# Altium PCB AFT05MS004.PcbDoc
Units mm, origin at the board's own origin, x right, y up, seen from the top; angles counter-clockwise.
Board outline 61.09 x 57.95 mm, 2 copper layers (Top Layer, Bottom Layer), stack 1.27 mm thick; 23 components, 12 nets, 62 pads, 66 vias.
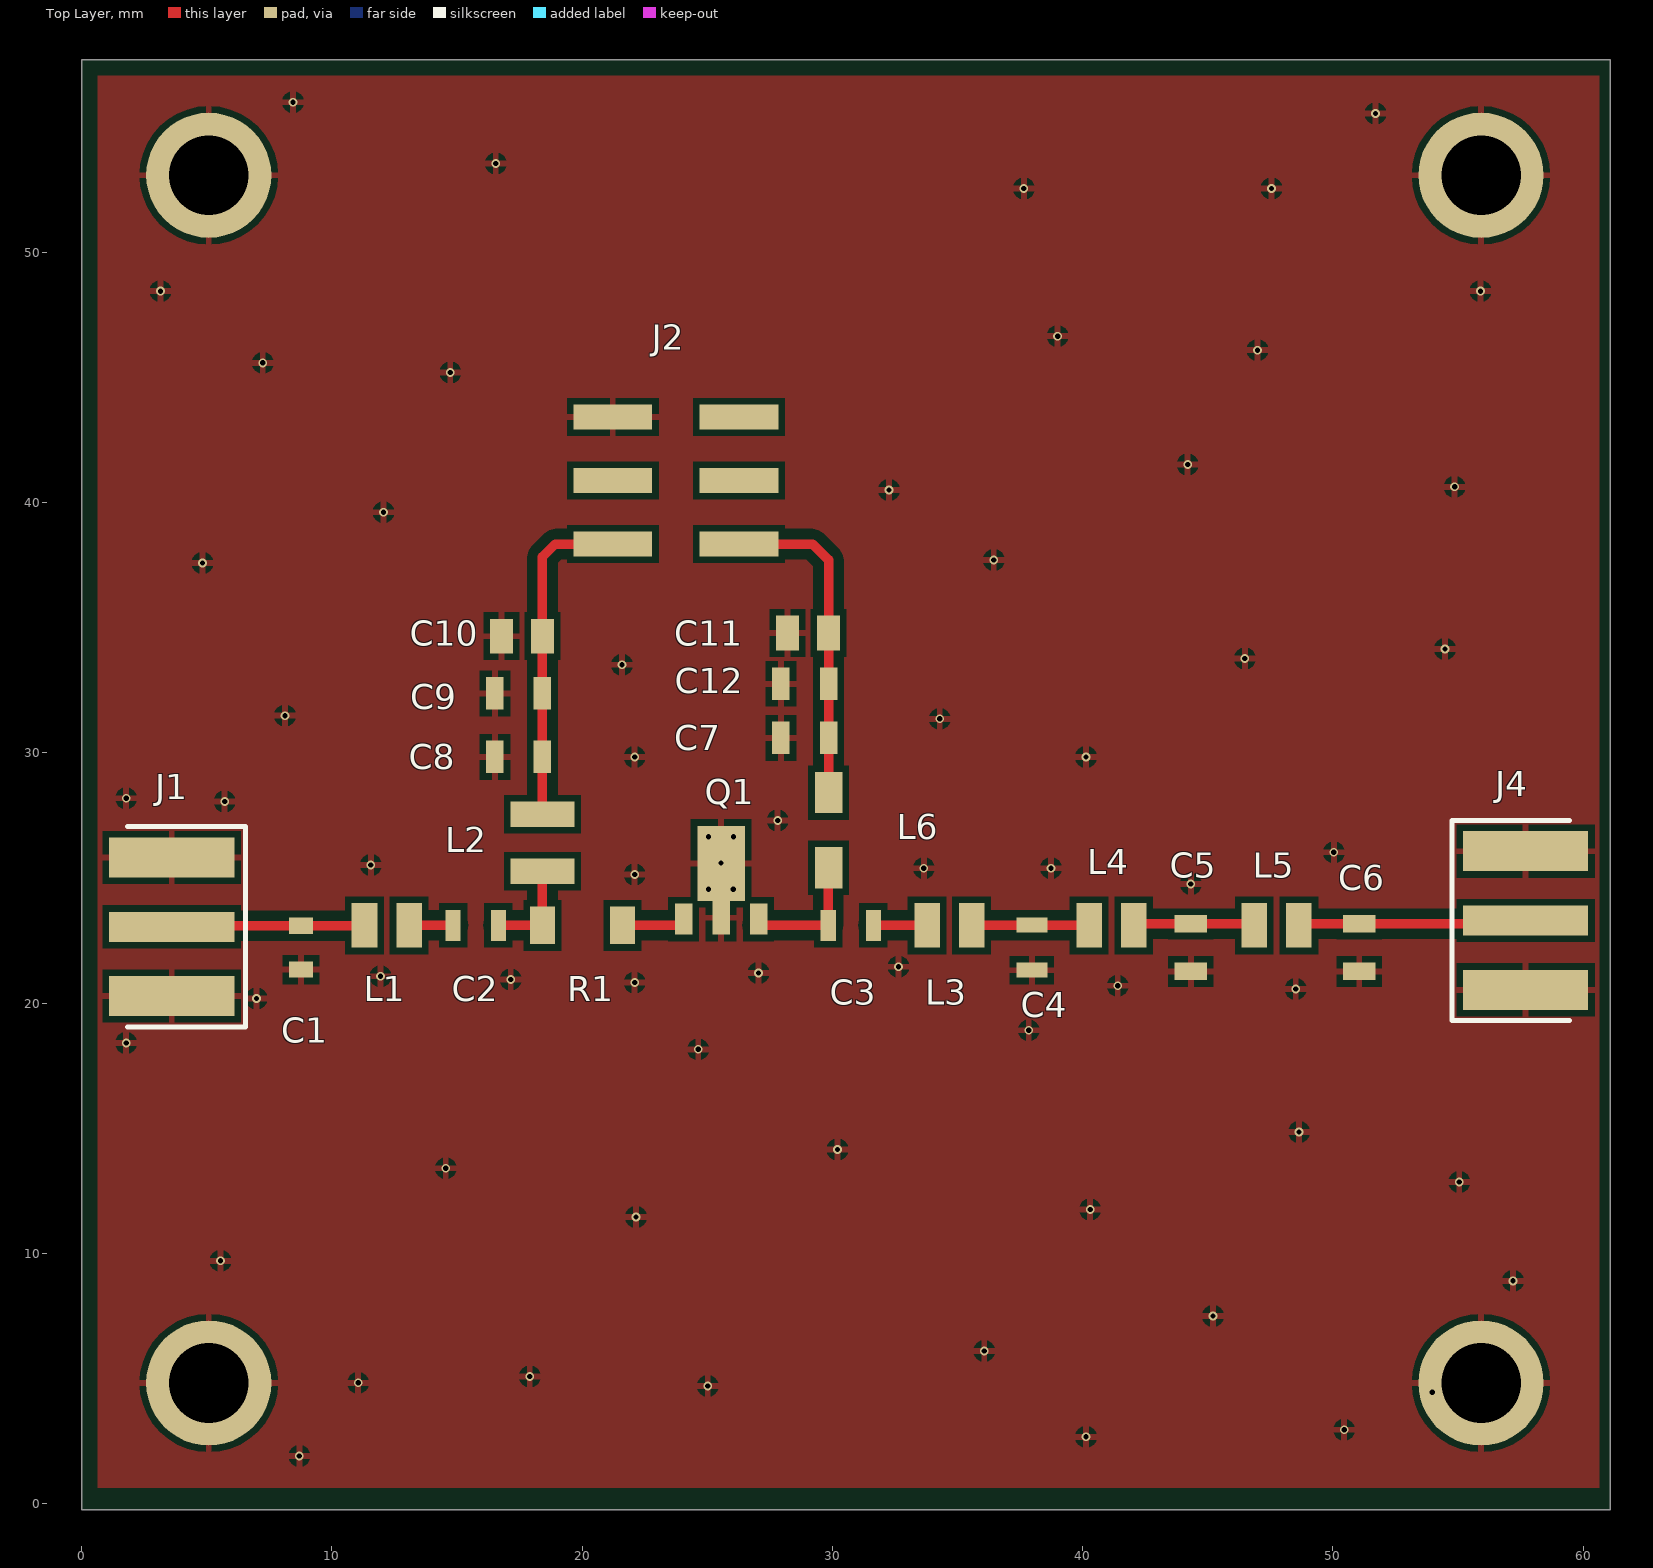
[diagram p0: Top Layer view]
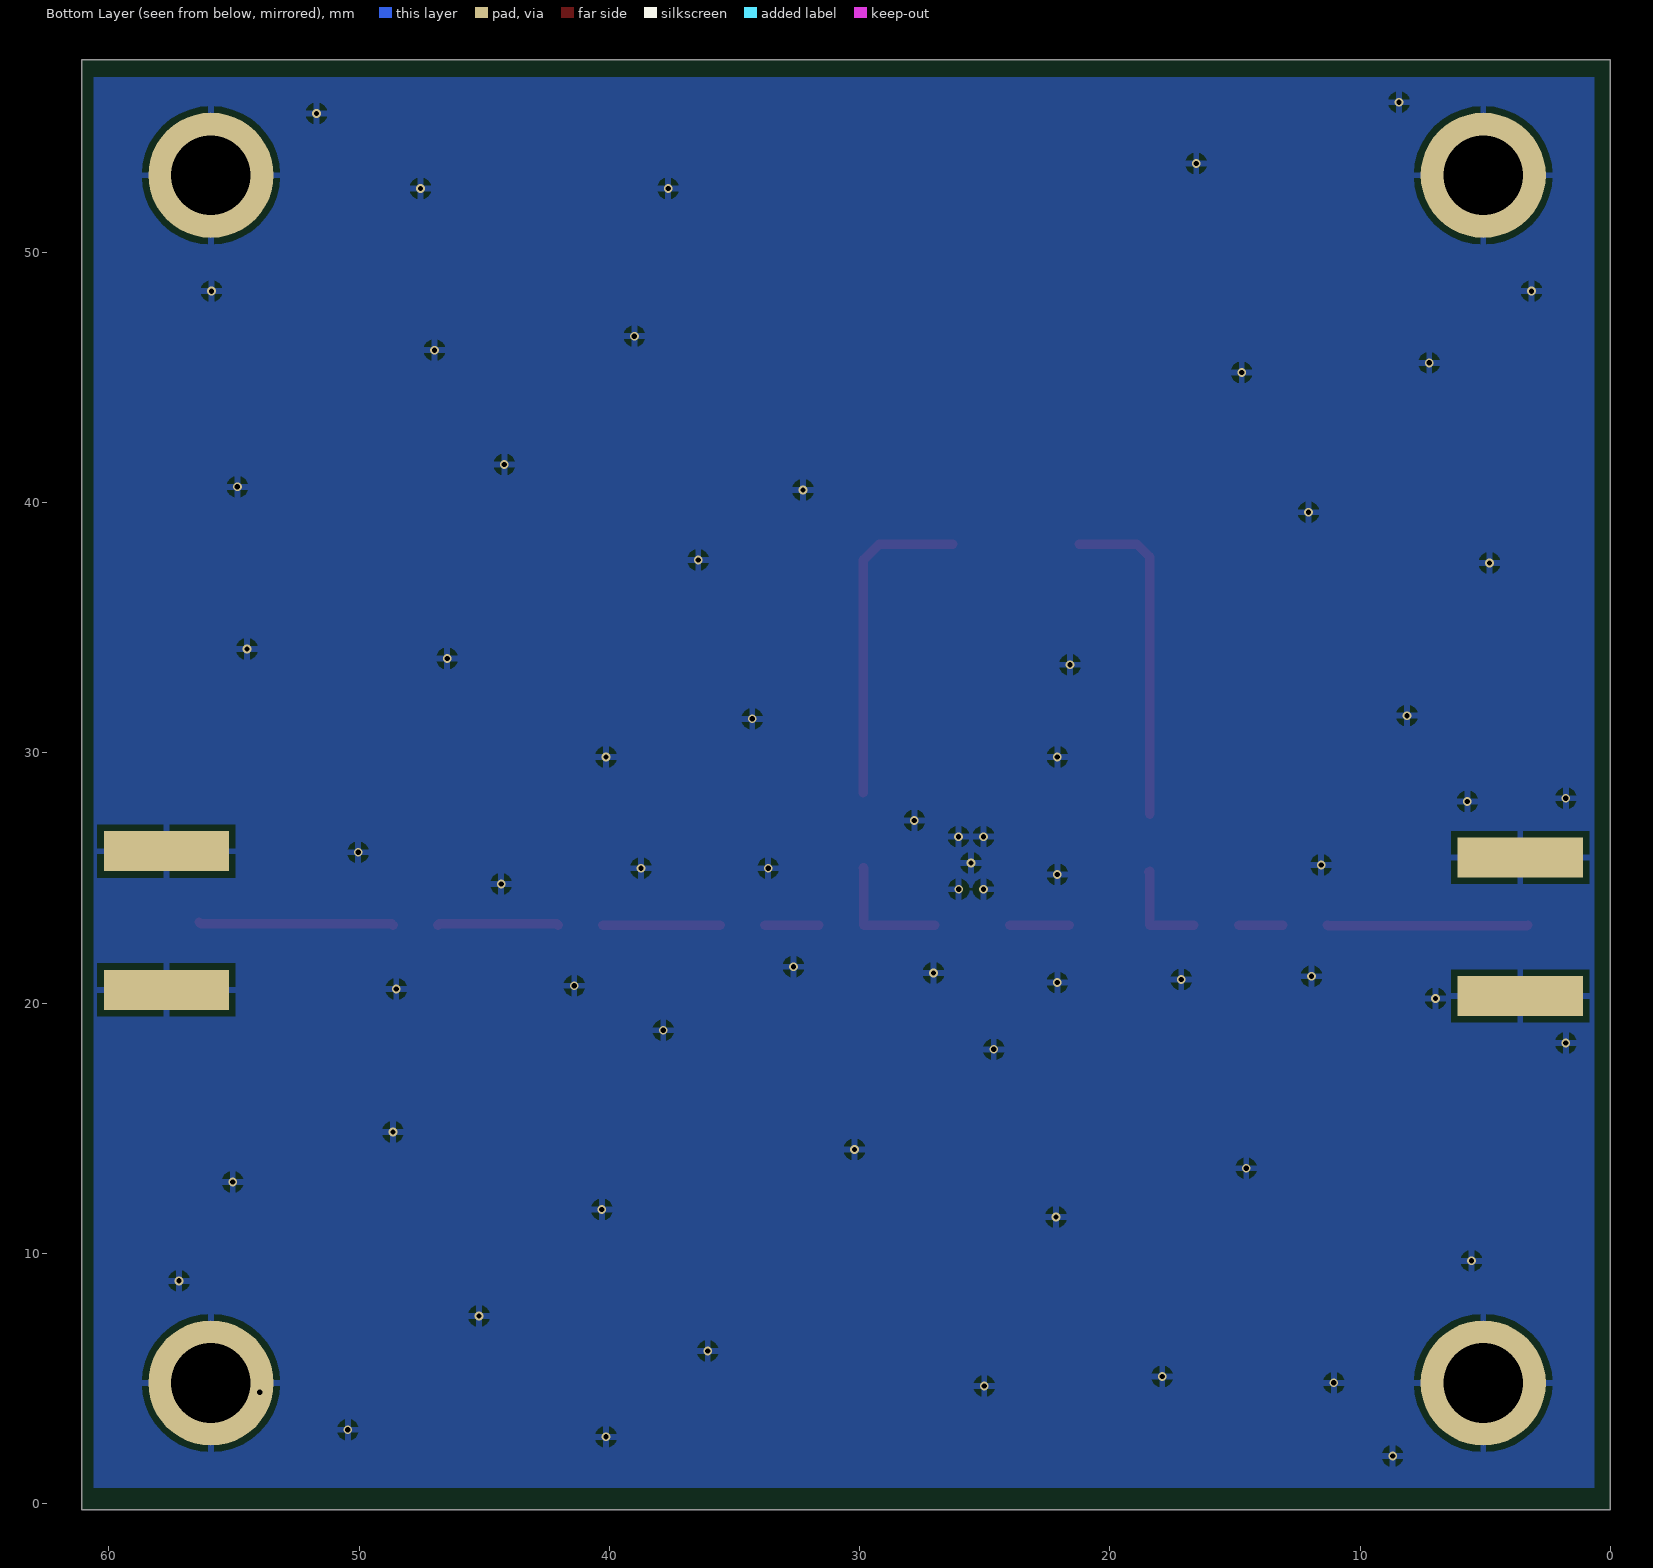
[diagram p1: Bottom Layer view, seen from below]

## Layer stack, top to bottom
Top Solder: solder mask 0.0152, Solder Resist, Dk 3.5
Top Layer: signal copper 0.035
Dielectric 1: dielectric 1.2, FR-4, Dk 4.8
Bottom Layer: signal copper 0.035
Bottom Solder: solder mask 0.0152, Solder Resist, Dk 3.5

## Board outline
0,-0.254 61.087,-0.254 61.087,57.7 0,57.7

## Design rules (kind name [scope] priority, off if disabled: settings)
Clearance [All] p1: gap=0.254 ignorepadtopadclearanceinfootprint=FALSE except(0: Arc-Hole Track-Hole SMDPad-Hole THPad-Hole Via-Hole Fill-Hole Poly-Hole Region-Hole Text-Hole; 0.15: Arc-Arc Arc-Track Arc-SMDPad Track-Track Track-SMDPad SMDPad-SMDPad; 0.4: Arc-Fill Arc-Poly Arc-Region Track-Fill Track-Poly Track-Region; 0.5: THPad-THPad)
MinimumSolderMaskSliver [All] p1: minsoldermaskwidth=0.1
PolygonConnect [All] p1: connectstyle=Relief reliefconductorwidth=0.254 reliefentries=4 polygonreliefangle="90 Angle" airgapwidth=0.254
RoutingLayers [All] p1: top layer_v5=TRUE bottom layer_v5=FALSE
RoutingVias [All] p1: holewidth=0.15 width=0.25 viastyle="Through Hole" minholewidth=0.15 minwidth=0.25 maxholewidth=0.2 maxwidth=0.3
SolderMaskExpansion [All] p1: expansion=0.102 istentingtop=FALSE
Width [All] p1: maxlimit=0.9 minlimit=0.15 preferedwidth=0.254 minimp=50.000000 maximp=50.000000 favimp=50.000000
28 further rules are at their usual default settings.

## Components (designator, comment, footprint, x,y, rotation, side; value= is the part's Value field where it differs from the comment)
C1 "GQM2195C2E430GB12D" GQM2195C2E100GB12D 8.763,22.215 r90 top
C2 "GRM21A5C2E102FWA1J" GRM21x 15.748,23.104 r0 top
C3 "GRM21A5C2E102FWA1J" GRM21x 30.734,23.104 r0 top
C4 "GRM21A5C2J820JWA1D" GRM21x 37.973,22.215 r90 top
C5 "GRM21A5C2E390FW01D" FP-GRM21A-0_2-MFG 44.323,22.215 r270 top
C6 "GQM2195C2E300GB12D" FP-GRM21A-0_2-MFG 51.054,22.215 r270 top
C7 "GQM2195C2E300GB12D" FP-GRM21A-0_2-MFG 28.895,30.597 r0 top
C8 "GQM2195C2E300GB12D" FP-GRM21A-0_2-MFG 17.465,29.835 r0 top
C9 "GRM21A5C2E102FWA1J" FP-GRM21A-0_2-MFG 17.465,32.375 r0 top
C10 "GJ821BR71H105KA12K" CAPC2012X135N 17.595,34.661 r0 top
C11 "GJ821BR71H105KA12K" CAPC2012X135N 29.025,34.788 r0 top
C12 "GRM21A5C2E102FWA1J" FP-GRM21A-0_2-MFG 28.895,32.756 r0 top
J1 "CON-SMA-EDGE-S" FP-CON-SMA-EDGE-S-MFG -3.66,23.05 r90 top
J2 "M20-8760342R" M208760342R 23.749,40.884 r90 top
J4 "CON-SMA-EDGE-S" FP-CON-SMA-EDGE-S-MFG 64.96,23.3 r270 top
L1 "LQW2BAS27NJ00L" LQW2BAN11NG00L 12.193,23.104 r0 top
L2 "LQW2UAS1R0F00L" LQW2UAS12NG00L 18.415,26.406 r90 top
L3 "LQW2BAS15NJ00L" LQW2BAN11NG00L 34.671,23.104 r0 top
L4 "LQW2BAS56NG00L" FP-LQW2BAN_00-MFG 41.148,23.104 r180 top
L5 "LQW2BAS56NG00L" FP-LQW2BAN_00-MFG 47.752,23.104 r180 top
L6 "744764901" INDM3425X240N 29.845,26.914 r90 top
Q1 "AFT05MS004NT1" MMG38151BT1 25.551,23.858 r0 top
R1 "RT1206FRE077R5L" FP-RT1206-MFG 20.015,23.104 r0 top value=7.5Ω

## Footprints (in the part's own frame and the unit in brackets; to place one, negate y for a bottom-side part, rotate by r counter-clockwise, add the part's x,y. Pads: shape width x height; smd on the part's side, far side on the other; paste and mask are expansions set on the pad)
CAPC2012X135N [mm]
  rect 0.91x1.39 smd: 1(-0.82,0) 2(0.82,0)
FP-CON-SMA-EDGE-S-MFG [mm]
  rect 1.2x5 smd paste+0 mask+0: 1(0,-7.26)
  rect 1.6x5 smd paste+0 mask+0: 2(-2.77,-7.26) 3(2.77,-7.26)
  rect 1.6x5 smd far side paste+0 mask+0: 4(-2.77,-7.26) 5(2.77,-7.26)
  silkscreen extent -4,-10.2 4,-5.5
FP-GRM21A-0_2-MFG [mm]
  rect 0.7x1.3 smd paste+0 mask+0: 1(-0.95,0) 2(0.95,0)
  body extent -1.4,-0.82 1.4,0.82, height 0.25
FP-LQW2BAN_00-MFG [mm]
  rect 1.02x1.78 smd paste+0 mask+0: 1(-0.89,0) 2(0.89,0)
  body extent -1.5,-0.99 1.5,0.99, height 0.25
FP-RT1206-MFG [mm]
  rect 1x1.5 smd paste+0 mask+0: 1(-1.6,0) 2(1.6,0)
  body extent -2.2,-0.95 2.2,0.95, height 0.25
GQM2195C2E100GB12D [mm]
  rect 0.65x0.95 smd: 1(-0.875,0) 2(0.875,0)
GRM21x [mm]
  rect 0.6x1.25 smd: 1(-0.9,0) 2(0.9,0)
INDM3425X240N [mm]
  rect 1.65x1.1 smd: 1(-1.5,0) 2(1.5,0)
LQW2BAN11NG00L [mm]
  rect 1.02x1.78 smd: 1(-0.89,0) 2(0.89,0)
LQW2UAS12NG00L [mm]
  rect 1.015x2.54 smd: 1(-1.143,0) 2(1.143,0)
M208760342R [mm]
  rect 1x3.15 smd: 1(-2.54,2.525) 2(-2.54,-2.525) 3(0,2.525) 4(0,-2.525) 5(2.54,2.525) 6(2.54,-2.525)
MMG38151BT1 [mm]
  rect 0.7x1.25 smd: 1(-1.5,-0.5) 3(1.5,-0.5)
  rect 0.7x1.35 smd: 2(0,-0.45)
  rect 1.9x3 smd: 4(0,1.725)

## Part data
C1 C4: "Capacitor", Manufacturer_Name="Murata Electronics"
  C1: Datasheet Link=https://psearch.en.murata.com/capacitor/product/GQM2195C2E430GB12%23.html, Height=1mm, Manufacturer_Part_Number=GQM2195C2E430GB12D
  C4: Datasheet Link=https://search.murata.co.jp/Ceramy/image/img/A01X/G101/ENG/GRM21A5C2J820JWA1-01.pdf, Height=1.25mm, Manufacturer_Part_Number=GRM21A5C2J820JWA1D
C2 C3: "Capacitor", Manufacturer_Name="Murata Electronics", Mouser Part Number=81-GRM21A5C2E102FWA1, Datasheet Link=https://search.murata.co.jp/Ceramy/image/img/A01X/G101/ENG/GRM21A5C2E102FWA1-01.pdf, Height=1.25mm, Manufacturer_Part_Number=GRM21A5C2E102FWA1J, Mouser Price/Stock=https://www.mouser.co.uk/ProductDetail/Murata-Electronics/GRM21A5C2E102FWA1J?qs=81r%252BiQLm7BQ9LqoY9FDtCA%3D%3D
C5 C6 C7 C8 C9 C12: library part CMP-06035-012030-1, "Chip Multilayer Ceramic Capacitors for General Purpose, 0805, 1000pF, C0G, 30ppm/°C, 1%, 250V"
C10 C11: "Capacitor", Manufacturer_Name="Murata Electronics", Mouser Part Number=81-GJ821BR71H105KA2K, Datasheet Link=https://www.mouser.it/datasheet/2/281/GJ821BR71H105KA12-01-1633769.pdf, Height=1.35mm, Manufacturer_Part_Number=GJ821BR71H105KA12K, Mouser Price/Stock=https://www.mouser.co.uk/ProductDetail/Murata-Electronics/GJ821BR71H105KA12K?qs=QzBtWTOodeUPH%252BEtzhwB2g%3D%3D
J1 J4: library part CMP-204357-000001-1, "CONN SMA JACK STR EDGE MNT", Frequency=18GHz, Manufacturer="RF Solutions Ltd.", Package=CONN_JACK, Automotive=No, Category=Conn, ComponentLink2Description=Datasheet, ComponentLink2URL=https://www.rfsolutions.co.uk/downloads/1498648656DS-CON-EDGE-SMA-4.pdf, Conn Orientation="Right Angle", Contact Material=Gold, Device Class L1=Connectors, Device Class L2="RF / Coaxial Connectors", Device Class L3=unset, Digikey Description="CONN SMA JACK STR EDGE MNT", Footprint Url=https://forum.upverter.com/uploads/default/original/3X/b/e/be75b907af57498775929d6d9099689c472e0307.pdf, Height=6.35mm, Impedance=50Ω, Is Female=yes, Lead Free=Yes, Manufacturer Part Number=CON-SMA-EDGE-S, Number Of Contacts=1, Octopart=https://octopart.com/con-sma-edge-s-rf+solutions-70967450, RoHS=TRUE, Shielding=true
J2: "Connector", Manufacturer_Name=Harwin, Mouser Part Number=855-M20-8760342R, Datasheet Link=https://cdn.harwin.com/pdfs/M20-876R.pdf, Height=11.5mm, Manufacturer_Part_Number=M20-8760342R, Mouser Price/Stock=https://www.mouser.co.uk/ProductDetail/Harwin/M20-8760342R?qs=vF78I%252BjhbY%2F5VOL01aBOqA%3D%3D
L1: "Inductor", Manufacturer_Name="Murata Electronics", Mouser Part Number=81-LQW2BAS27NJ00L, Datasheet Link=https://psearch.en.murata.com/inductor/product/LQW2BAS27NJ00%23.html, Height=1.52mm, Manufacturer_Part_Number=LQW2BAS27NJ00L, Mouser Price/Stock=https://www.mouser.com/Search/Refine.aspx?Keyword=81-LQW2BAS27NJ00L
L2: "Inductor", Manufacturer_Name="Murata Electronics", Mouser Part Number=81-LQW2UAS1R0F00L, Arrow Part Number=LQW2UAS1R0F00L, Arrow Price/Stock=https://www.arrow.com/en/products/lqw2uas1r0f00l/murata-manufacturing, Datasheet Link=https://psearch.en.murata.com/inductor/product/LQW2UAS1R0F00%23.html, Height=2.03mm, Manufacturer_Part_Number=LQW2UAS1R0F00L, Mouser Price/Stock=https://www.mouser.co.uk/ProductDetail/Murata-Electronics/LQW2UAS1R0F00L?qs=Mv7BduZupUgqoNE0G54YCQ%3D%3D
L3: library part LQW2BAS18NJ00L, "Inductor", Manufacturer_Name="Murata Electronics", Mouser Part Number=81-LQW2BAS18NJ00L, Arrow Part Number=LQW2BAS18NJ00L, Arrow Price/Stock=https://www.arrow.com/en/products/lqw2bas18nj00l/murata-manufacturing, Datasheet Link=https://psearch.en.murata.com/inductor/product/LQW2BAS18NJ00%23.html, Height=1.52mm, Manufacturer_Part_Number=LQW2BAS18NJ00L, Mouser Price/Stock=https://www.mouser.co.uk/ProductDetail/Murata-Electronics/LQW2BAS18NJ00L?qs=XY81OjNnpal2Dbjq17m9Aw%3D%3D
L4 L5: library part CMP-06042-001883-1, "Wire Wound RF Inductor 56nH ±2% 500mA 0.34Ω 0805 (2015)", Case/Package=0805, Current Rating=500mA, DC Resistance (DCR)=340mR, Inductance=56nH, Max Operating Temperature=85°C, Min Operating Temperature=-40°C, Package Quantity=2000, Resistor Type=Wirewound, Self Resonant Frequency=1.6GHz, Test Frequency=200MHz, Tolerance=2%, Height - Seated (Max)=0.061inch, Length=0.082inch, Mount="Surface Mount", Packaging="Tape and Reel", Shielding=Unshielded, Width=0.06inch
L6: "Inductor", Manufacturer_Name="Wurth Elektronik", Mouser Part Number=710-744764901, Datasheet Link=https://www.we-online.com/catalog/datasheet/744764901.pdf, Height=2.4mm, Manufacturer_Part_Number=744764901, Mouser Price/Stock=https://www.mouser.com/Search/Refine.aspx?Keyword=710-744764901
Q1: "MOSFET (N-Channel)", Manufacturer_Name=NXP, Mouser Part Number=841-AFT05MS004NT1, Arrow Part Number=AFT05MS004NT1, Arrow Price/Stock=https://www.arrow.com/en/products/aft05ms004nt1/nxp-semiconductors?region=nac, Datasheet Link=http://www.nxp.com/docs/en/data-sheet/AFT05MS004N.pdf, Height=1mm, Manufacturer_Part_Number=AFT05MS004NT1, Mouser Price/Stock=https://www.mouser.co.uk/ProductDetail/NXP-Semiconductors/AFT05MS004NT1?qs=WBUF01kN13krUbpKnCYN3g%3D%3D
R1: library part CMP-03412-009810-1, "RES SMD 7.5 OHM 1% 1/4W 1206", Manufacturer=Yageo, Package=RT1206, Power Rating=0.25W, Resistance=7.5Ω, Temperature="-55°C to +155°C", Temperature Coefficient="50 ppm/°C", Temperature Range High=+155°C, Temperature Range Low=-55°C, Tolerance=0.0002, Voltage Rating=200V, Automotive=No, Category=Res, ComponentLink2Description=Datasheet, ComponentLink2URL=http://www.yageo.com/documents/recent/PYu-RT_1-to-0.01_RoHS_L_9.pdf, Composition="Thin Film", Device Class L1="Passive Components", Device Class L2=Resistors, Device Class L3="Chip SMD Resistors", Digikey Description="RES SMD 7.5 OHM 1% 1/4W 1206", Footprint Url=http://www.yageo.com/exep/pages/download/literatures/PYu-R_Mount_10.pdf, Height=0.65mm, Ipc Land Pattern Name=RESC310160X55, Lead Free=Yes, Manufacturer Part Number=RT1206FRE077R5L, Octopart=https://octopart.com/rt1206fre077r5l-yageo-71404764, RoHS=TRUE, Series=RT

## Free pads (board coordinates)
  round 5 hole 3.18: 2(5.08,4.82) 2(5.08,53.08) 2(55.92,4.82) 2(55.92,53.08)

## Via types
v1: diameter 0.35, hole 0.21, Top Layer to Bottom Layer, 66 vias

## Nets (pads, with @x,y where several pads share a name; then routed paths per layer and width w, separated by ;. In a path a pad name is that pad's centre, name@x,y a point inside that pad or via, vN(x,y) a via of type N, cw(c..) or ccw(c..) an arc to the next point about the centre after c; other vN are vias at no path point)
Bias_Drain: C7.2 C11.2 C12.2 J2.2 L6.2 | length 13.1
  Top Layer w0.381: J2.2 29.21,38.344 29.845,37.709 C11.2 C12.2 C7.2 L6.2
Bias_Gate: C8.2 C9.2 C10.2 J2.1 L2.2 | length 13.3
  Top Layer w0.381: L2.2 C8.2 C9.2 C10.2 18.415,37.836 18.923,38.344 J2.1
GND: C1.1 C4.1 C5.2 C6.2 C7.1 C8.1 C9.1 C10.1 C11.1 C12.1 J1.2 J1.3 J1.4 J1.5 J2.5 J4.2 J4.3 J4.4 J4.5 pad.2 Q1.2 Q1.4
  other v1: 8.7,1.9 40.132,2.667 50.45,2.95 53.975,4.445 25.019,4.699 11.049,4.826 17.907,5.08 36.068,6.096 45.212,7.493 57.2,8.9 5.55,9.7 22.15,11.45 40.3,11.75 55.05,12.85 14.55,13.4 30.2,14.15 48.65,14.85 24.638,18.151 1.778,18.405 37.846,18.913 6.985,20.183 48.514,20.564 41.402,20.691 22.098,20.818 17.145,20.945 11.938,21.072 27.051,21.199 32.639,21.453 26.042,24.547 25.05,24.55 44.323,24.755 22.098,25.136 33.655,25.39 38.735,25.39 11.557,25.517 25.55,25.6 50.038,26.025 25.05,26.65 26.05,26.65 27.813,27.295 5.715,28.057 1.778,28.184 22.098,29.835 40.132,29.835 34.29,31.359 8.128,31.486 21.59,33.518 46.482,33.772 54.483,34.153 4.826,37.582 36.449,37.709 12.065,39.614 32.258,40.503 54.864,40.63 44.196,41.519 14.732,45.202 7.239,45.583 46.99,46.091 39,46.65 3.15,48.45 55.9,48.45 37.65,52.55 47.55,52.55 16.55,53.55 51.7,55.55 8.45,56
NetC1_2: C1.2 J1.1 L1.1 | length 8
  Top Layer w0.381: J1.1@3.302,23.104 3.316,23.09 C1.2 11.289,23.09 L1.1
NetC2_1: C2.1 L1.2 | length 1.8
  Top Layer w0.381: L1.2 C2.1
NetC2_2: C2.2 L2.1 R1.1 | length 4
  Top Layer w0.381: C2.2 R1.1 L2.1 L2.1@18.437,25.241
NetC3_1: C3.1 L6.1 Q1.3 | length 5.1
  Top Layer w0.381: Q1.3@27.003,23.104 C3.1 29.84,23.11 29.84,25.409 L6.1
NetC3_2: C3.2 L3.1 | length 2.1
  Top Layer w0.381: C3.2 L3.1
NetC4_2: C4.2 L3.2 L4.2 | length 4.7
  Top Layer w0.381: L3.2 35.572,23.115 C4.2 40.247,23.115 L4.2
NetC5_1: C5.1 L4.1 L5.2 | length 4.9
  Top Layer w0.381: L4.1 42.099,23.165 C5.1 46.801,23.165 L5.2
NetC6_1: C6.1 J4.1 L5.1 | length 7.8
  Top Layer w0.381: L5.1 48.703,23.165 C6.1 56.322,23.165 J4.1@56.388,23.231
NetQ1_1: Q1.1 R1.2 | length 2.4
  Top Layer w0.381: R1.2 22.809,23.104 Q1.1@24.003,23.104
pads on no net: J2.3 J2.4 J2.6

## Polygon pours and split planes (outlines as drawn)
GND on Bottom Layer "NONET_L-01_P-001" (solid, pour order 0): 0.635,57 60.6,57 60.6,0.635 0.635,0.635
GND on Top Layer "NONET_L-01_P-001" (solid, pour order 1): 0.635,57.05 60.65,57.05 60.65,0.635 0.635,0.635
no net on Bottom Solder "NONET_L-01_P-001" (solid): 8.45,53.25 8.45,4.8 52.45,4.8 52.45,53.25

## Silkscreen, mask and mechanical layers (free items; w line width, h text height)
Mechanical 1:
  lines w0.1: 0.05,-0.2 61.05,-0.2 61.05,57.65 0.05,57.65 0.05,-0.2